# Altium PCB BMS.PcbDoc (part 1 of 2)
Units mil, origin at the board's own origin, x right, y up, seen from the top; angles counter-clockwise.
Board outline 1940 x 2890 mil, 2 copper layers (Top Layer, Bottom Layer); 210 components, 157 nets, 682 pads, 299 vias.
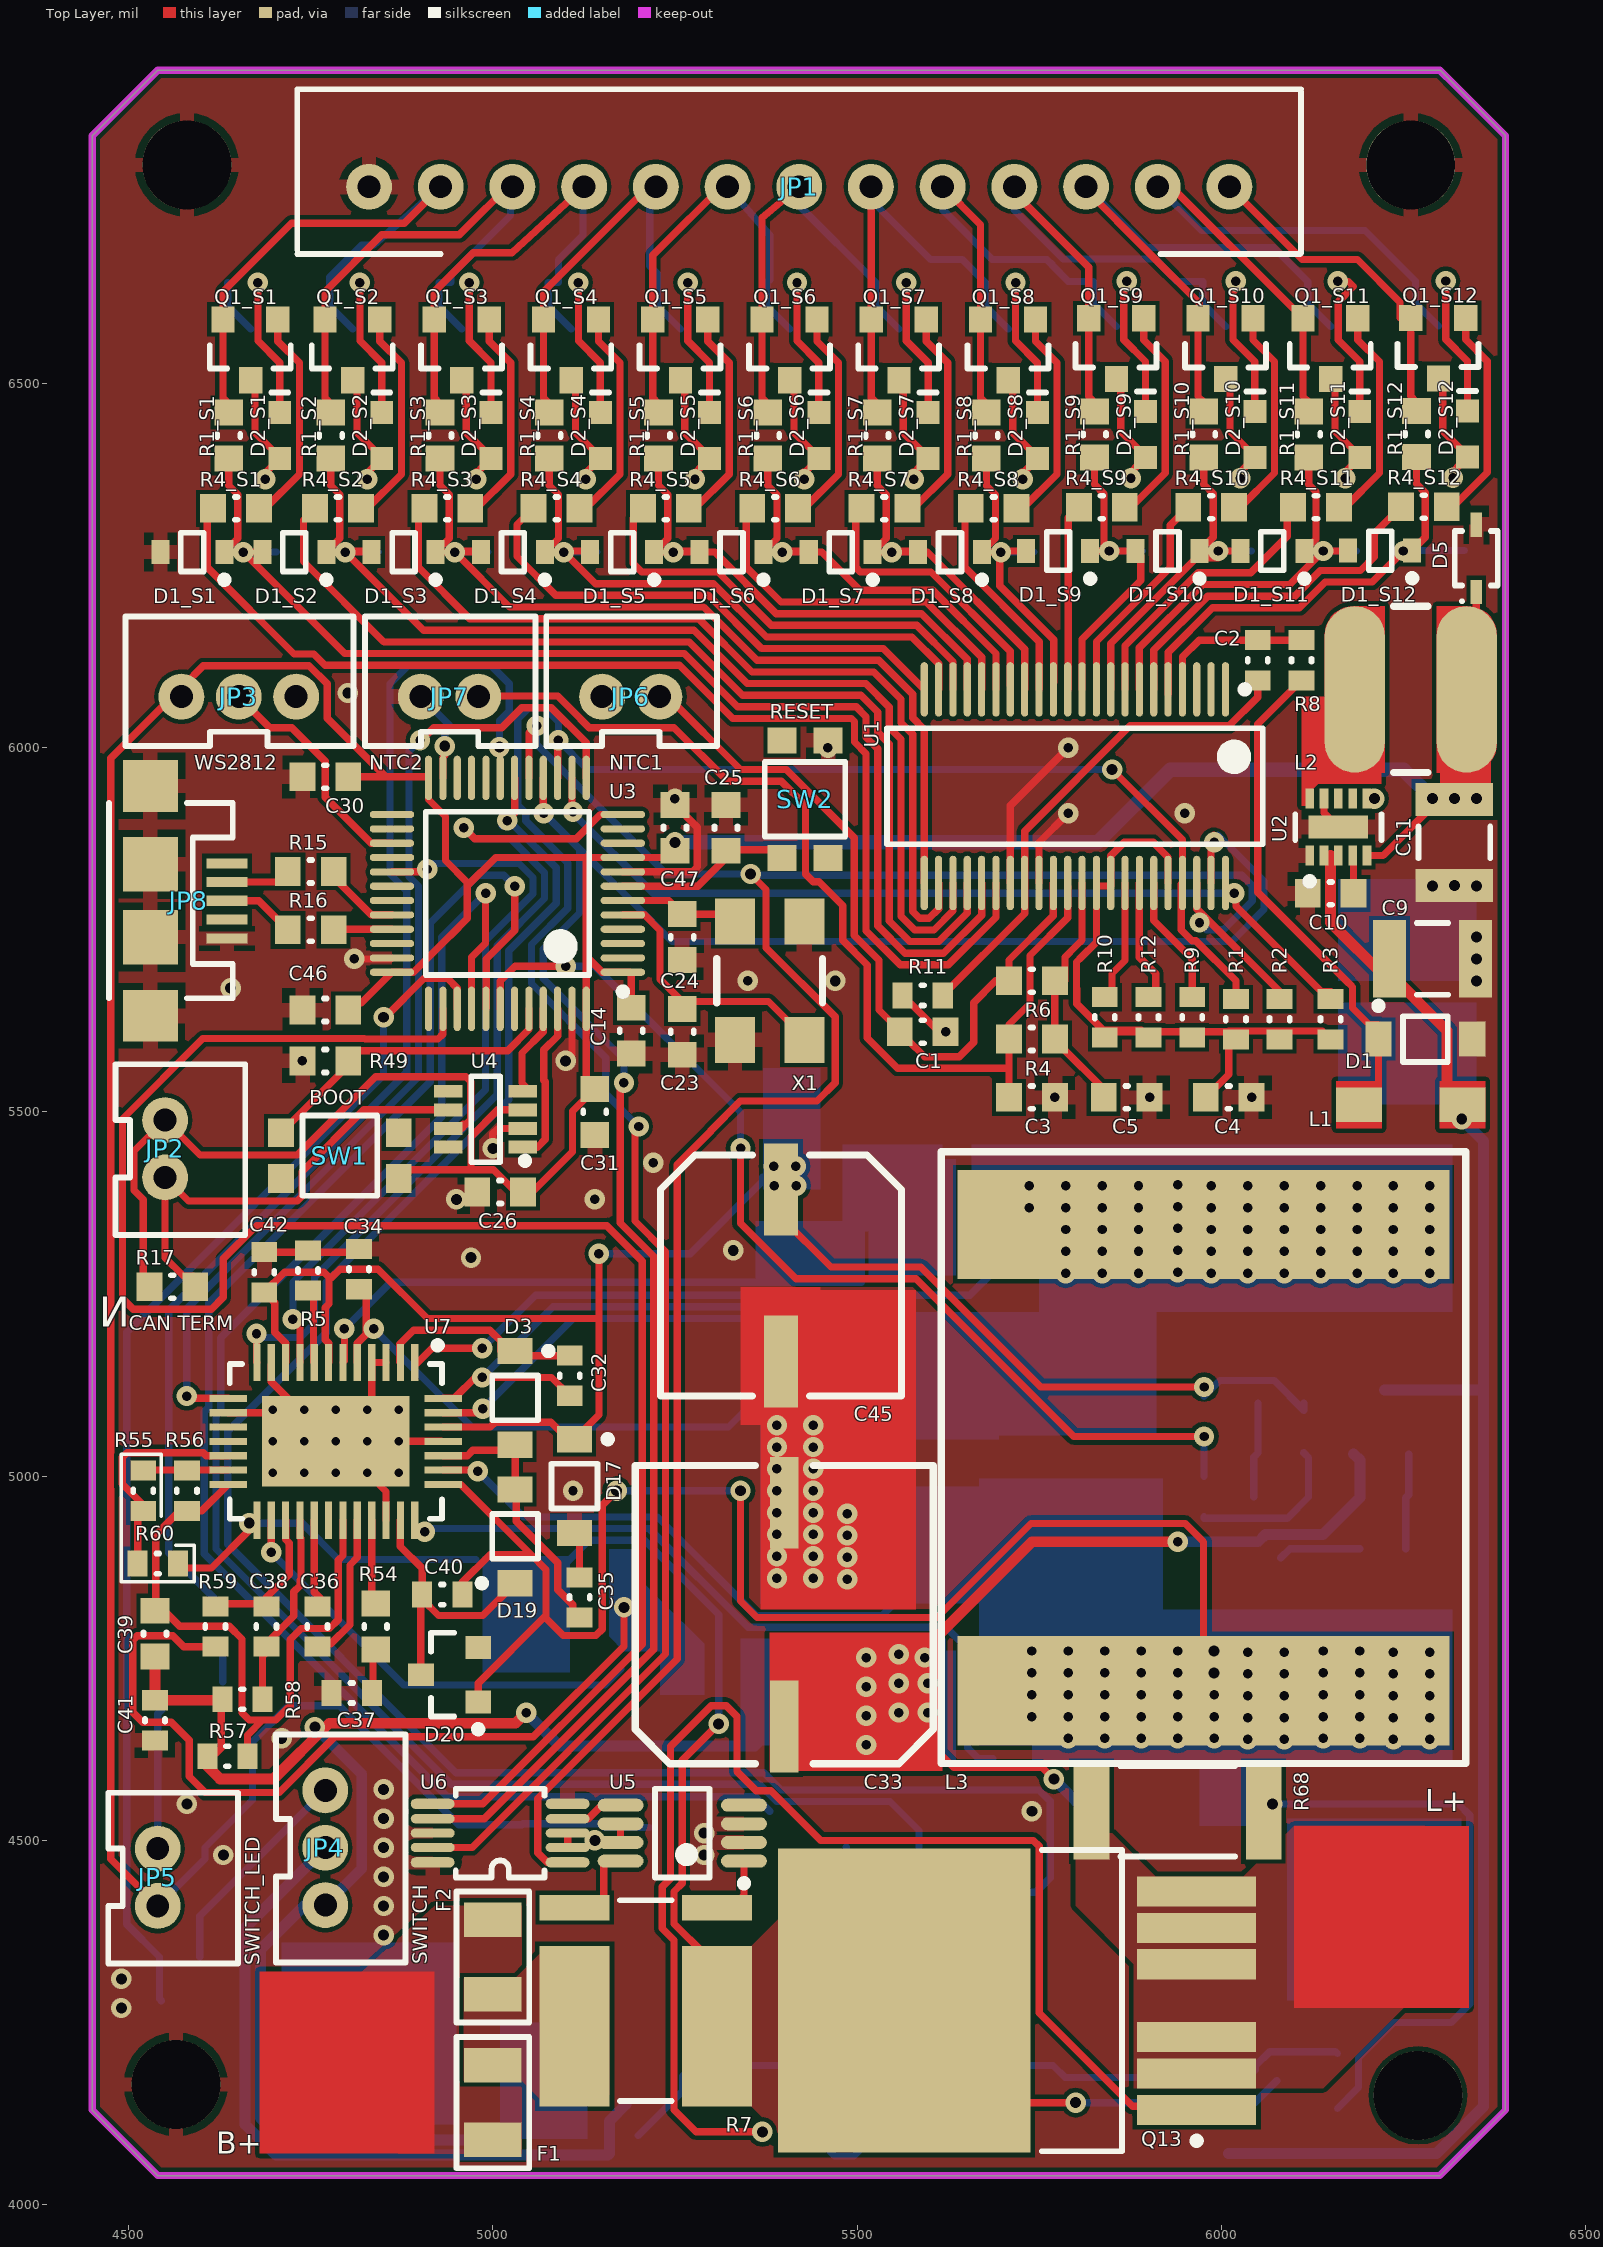
[diagram p0: Top Layer view]
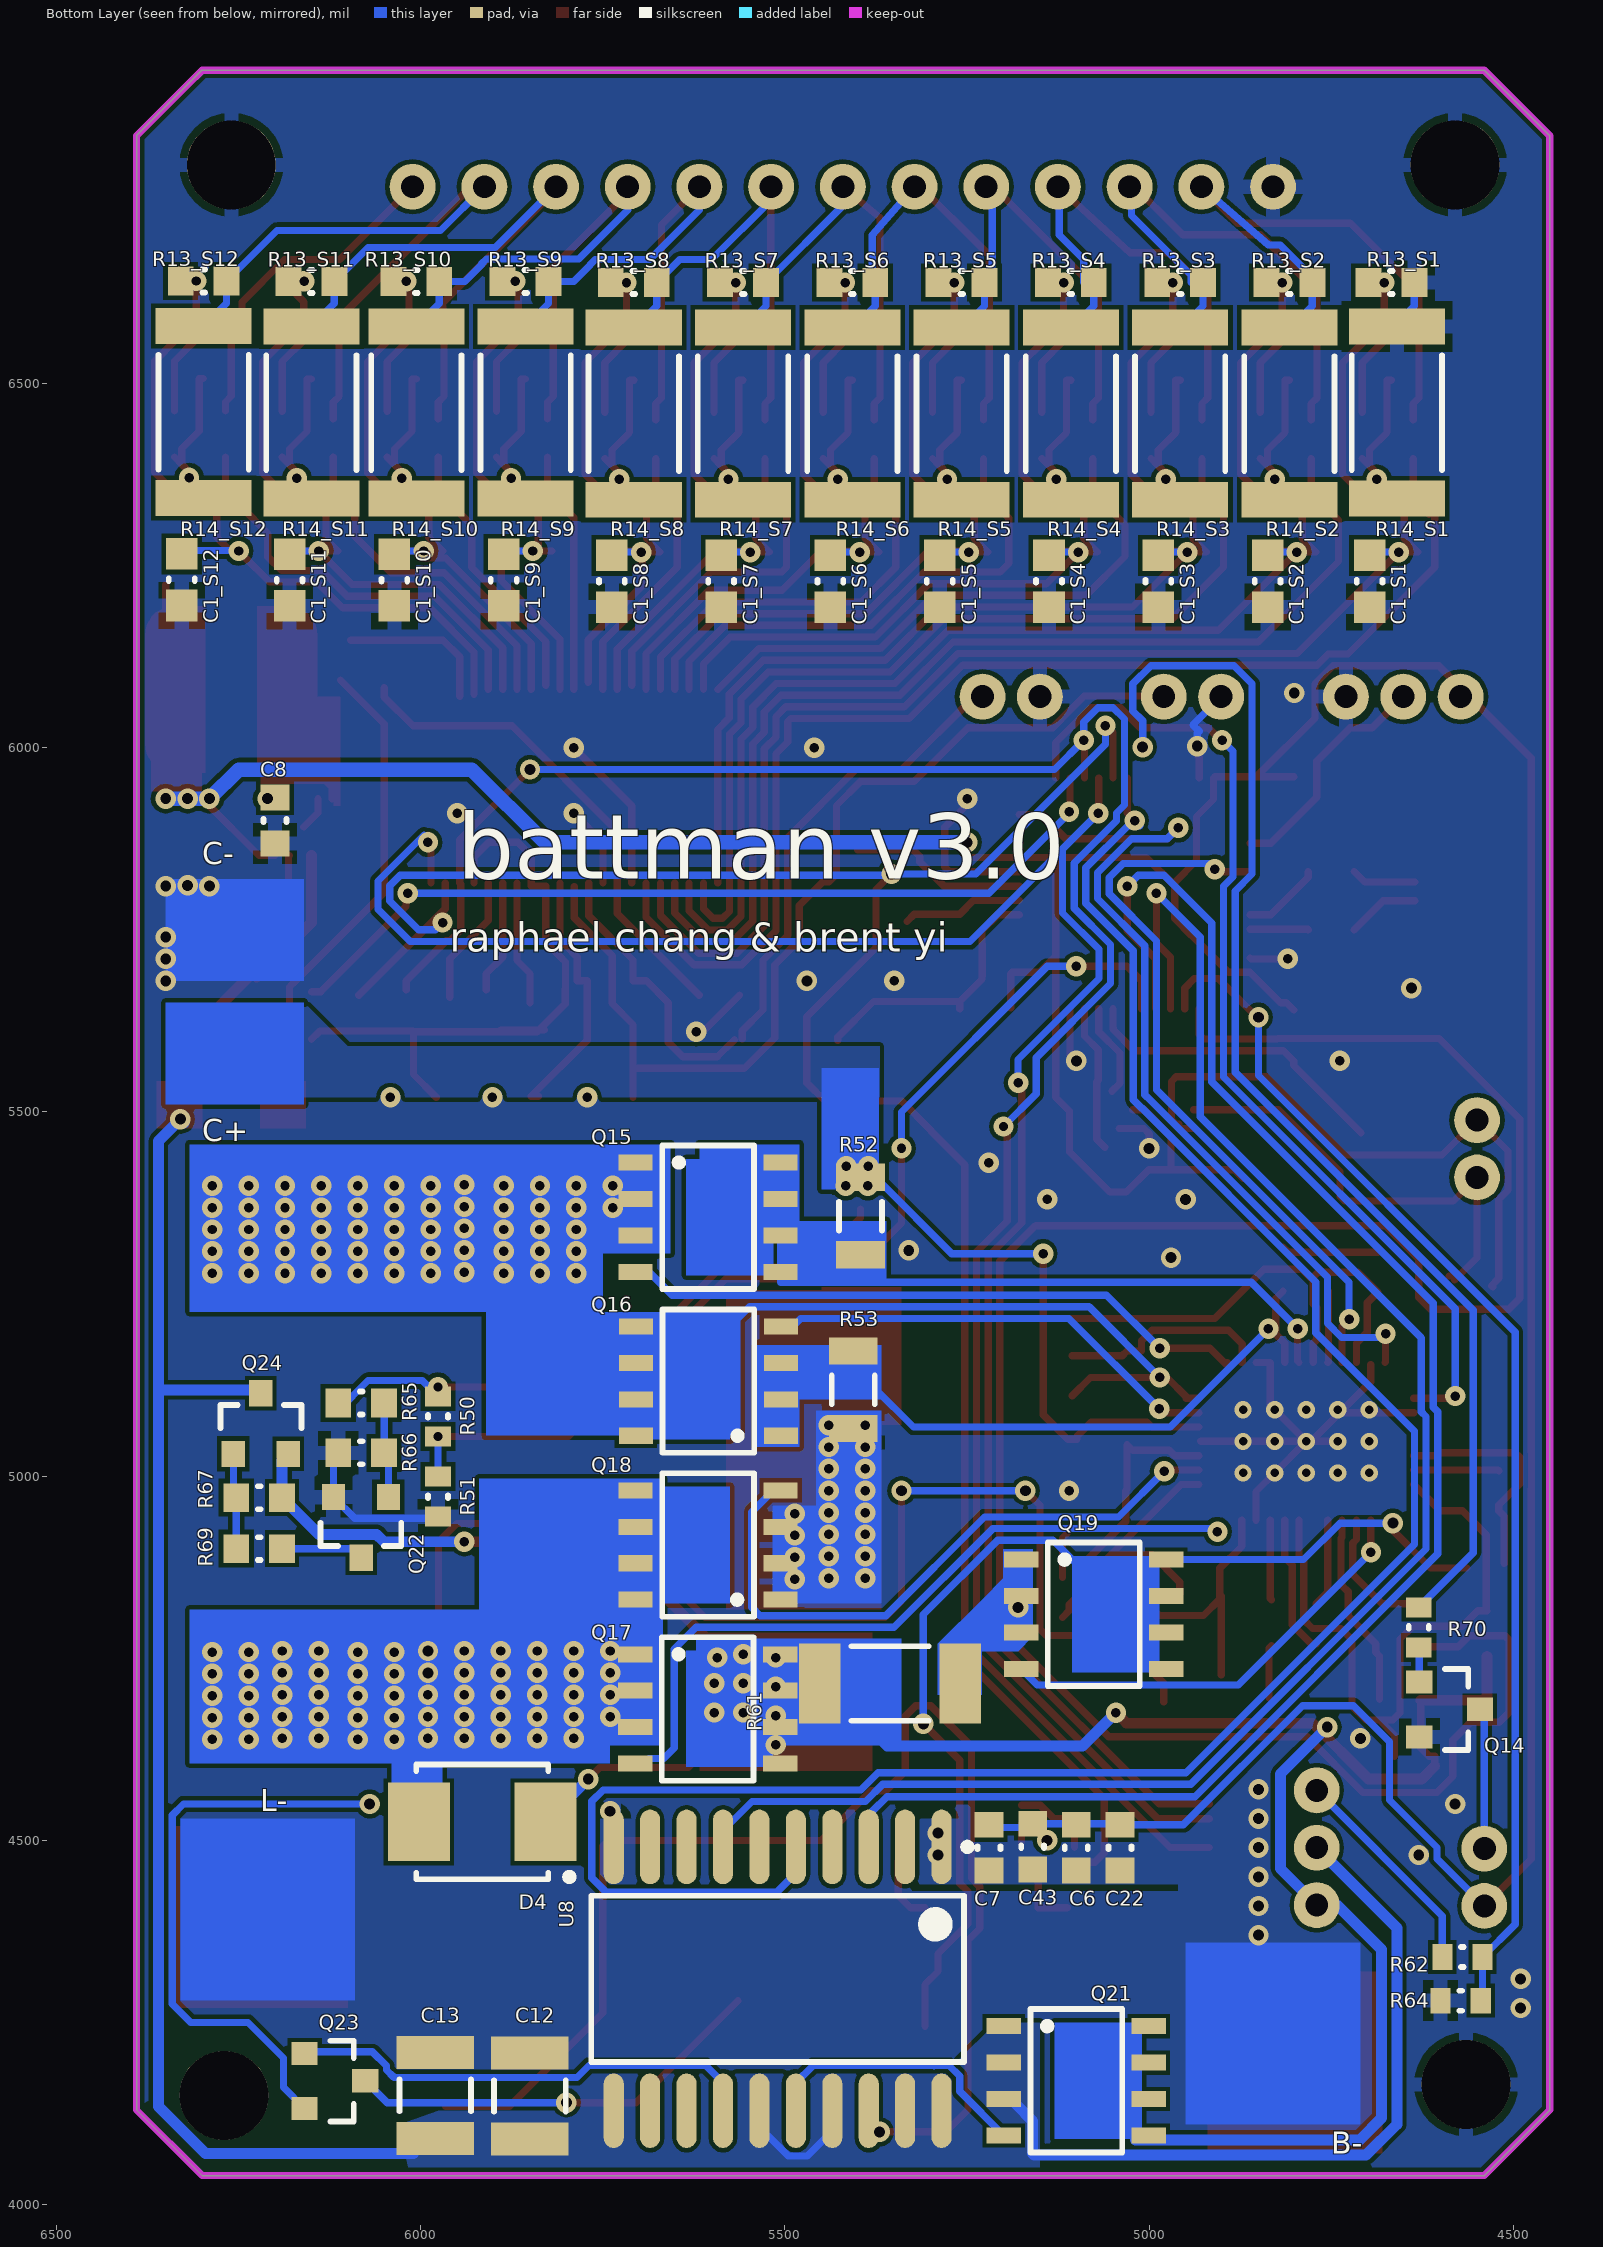
[diagram p1: Bottom Layer view, seen from below]

## Layer stack, top to bottom
Top Solder: solder mask 0.4, Solder Resist, Dk 3.5
Top Layer: signal copper 1.4
Dielectric 1: dielectric 12.6, FR-4, Dk 4.8
Bottom Layer: signal copper 1.4
Bottom Solder: solder mask 0.4, Solder Resist, Dk 3.5

## Board outline
4450,4130 4540,4040 6300,4040 6390,4130 6390,6840 6320,6910 6300,6930 4540,6930 4450,6840

## Design rules (kind name [scope] priority, off if disabled: settings)
Clearance [All] p1: gap=6
HoleSize [All] p1: absolutevalues=TRUE maxlimit=500 minlimit=1 maxpercent=80.000 minpercent=20.000
MinimumSolderMaskSliver [All] p1: minsoldermaskwidth=3
PlaneClearance PlaneClearanceGround [IsNamedPolygon('Power')] p1: clearance=10
PlaneClearance [All] p2: clearance=20
PolygonConnect PolygonConnectPower [IsNamedPolygon('Power')] p1: connectstyle=Direct reliefconductorwidth=10 reliefentries=4 polygonreliefangle="90 Angle" airgapwidth=10
PolygonConnect PolygonConnectVDD [All vs InNet('VDD')] p2: connectstyle=Direct reliefconductorwidth=10 reliefentries=4 polygonreliefangle="90 Angle" airgapwidth=10
PolygonConnect PolygonConnectVia [All vs IsVia] p3: connectstyle=Direct reliefconductorwidth=10 reliefentries=4 polygonreliefangle="90 Angle" airgapwidth=10
PolygonConnect [All] p4: connectstyle=Relief reliefconductorwidth=20 reliefentries=4 polygonreliefangle="90 Angle" airgapwidth=10
RoomDefinition Power [InComponentClass('Power')] p1: confinementstyle=ConfineIn formatcopy=TRUE lockcomponents=FALSE outline 4458.16,4317.26 4458.16,4579.51 4515,4579.51 4515,4749.12 4597.36,4749.12 4597.36,4848.7 4662.64,4848.7 4662.64,4659.51 4894,4659.51 4894,4627.76 6104.53,4627.76 6104.53,4239.12 6190.37,4239.12 6190.37,4099.96 6067.6,4099.96 6067.6,4040.51 5063.94,4040.51 5063.94,4036.06 4936.06,4036.06 4936.06,4247.36 4516.18,4247.36 4516.18,4307.36 4513.74,4307.36 4513.74,4317.26
RoomDefinition BuckConverter [InComponentClass('BuckConverter')] p2: confinementstyle=ConfineIn formatcopy=TRUE lockcomponents=FALSE outline 6079.96,5759.49 6079.96,5840.51 6086.65,5840.51 6086.65,5958.7 6128.89,5958.7 6128.89,6219.17 6303.58,6219.17 6303.58,6348.9 6396.42,6348.9 6396.42,6191.1 6393.98,6191.1 6393.98,5766.5 6393.5,5766.5 6393.5,5636.02 6186.5,5636.02 6186.5,5759.49
RoomDefinition U_Charging [InComponentClass('U_Charging')] p3: confinementstyle=ConfineIn formatcopy=TRUE lockcomponents=FALSE outline 4480,4841.24 4480,4906.52 4492.94,4906.52 4492.94,5181.75 4598.2,5181.75 4598.2,5199.49 4653.62,5199.49 4653.62,5336.2 4713.62,5336.2 4713.62,5338.65 4783.62,5338.65 4783.62,5340.43 5215.22,5340.43 5215.22,5482.34 5575.93,5482.34 5575.93,5467.85 5741.59,5467.85 5741.59,5460.49 6350.57,5460.49 6350.57,4590.49 6060,4590.49 6060,4430 5771.15,4430 5771.15,4568.13 5470.06,4568.13 5470.06,4575.51 5176.54,4575.51 5176.54,4582.85 4579.32,4582.85 4579.32,4608.57 4503.62,4608.57 4503.62,4713.84 4495.75,4713.84 4495.75,4841.24
RoomDefinition U_MCU [InComponentClass('U_MCU')] p4: confinementstyle=ConfineIn formatcopy=TRUE lockcomponents=FALSE outline 4407.24,5583.5 4407.24,5995.98 4481.75,5995.98 4481.75,6194 4822.74,6194 4822.74,6040.72 5497.56,6040.72 5497.56,5817.87 5468,5817.87 5468,5554 5300.51,5554 5300.51,5539.96 5180.51,5539.96 5180.51,5429.96 5083.66,5429.96 5083.66,5410.12 5080.04,5410.12 5080.04,5349.49 4674,5349.49 4674,5317.26 4630.04,5317.26 4630.04,5219.49 4489.96,5219.49 4489.96,5317.26 4468.16,5317.26 4468.16,5583.5
RoomDefinition U_LTC6803 [InComponentClass('U_LTC6803')] p5: confinementstyle=ConfineIn formatcopy=TRUE lockcomponents=FALSE outline 4717.57,6663.48 4717.57,6917.86 6123.53,6917.86 6123.53,6176.26 6142.64,6176.26 6142.64,5683.48 6182.64,5683.48 6182.64,5665.51 6377.2,5665.51 6377.2,5557.4 6377.28,5557.4 6377.28,5462.6 6142.72,5462.6 6142.72,5479.49 5669.96,5479.49 5669.96,5569.49 5519.96,5569.49 5519.96,5988.16 4810.49,5988.16 4810.49,6663.48
RoomDefinition S12 [InComponentClass('S12')] p6: confinementstyle=ConfineIn formatcopy=TRUE lockcomponents=FALSE outline 6152,6150.63 6388,6150.63 6388,6690.63 6152,6690.63
RoomDefinition S11 [InComponentClass('S11')] p7: confinementstyle=ConfineIn formatcopy=TRUE lockcomponents=TRUE outline 6004,6150 6240,6150 6240,6690 6004,6690
RoomDefinition S10 [InComponentClass('S10')] p8: confinementstyle=ConfineIn formatcopy=TRUE lockcomponents=FALSE outline 5860,6150 6096,6150 6096,6690 5860,6690
RoomDefinition S9 [InComponentClass('S9')] p9: confinementstyle=ConfineIn formatcopy=TRUE lockcomponents=FALSE outline 5710,6150 5946,6150 5946,6690 5710,6690
RoomDefinition S8 [InComponentClass('S8')] p10: confinementstyle=ConfineIn formatcopy=TRUE lockcomponents=FALSE outline 5560,6150 5796,6150 5796,6690 5560,6690
RoomDefinition S7 [InComponentClass('S7')] p11: confinementstyle=ConfineIn formatcopy=TRUE lockcomponents=FALSE outline 5410,6150 5646,6150 5646,6690 5410,6690
RoomDefinition S6 [InComponentClass('S6')] p12: confinementstyle=ConfineIn formatcopy=TRUE lockcomponents=FALSE outline 5260,6150 5496,6150 5496,6690 5260,6690
RoomDefinition S5 [InComponentClass('S5')] p13: confinementstyle=ConfineIn formatcopy=TRUE lockcomponents=FALSE outline 5110,6150 5346,6150 5346,6690 5110,6690
RoomDefinition S4 [InComponentClass('S4')] p14: confinementstyle=ConfineIn formatcopy=TRUE lockcomponents=FALSE outline 4960,6150 5196,6150 5196,6690 4960,6690
RoomDefinition S3 [InComponentClass('S3')] p15: confinementstyle=ConfineIn formatcopy=TRUE lockcomponents=FALSE outline 4810,6150 5046,6150 5046,6690 4810,6690
RoomDefinition S2 [InComponentClass('S2')] p16: confinementstyle=ConfineIn formatcopy=TRUE lockcomponents=FALSE outline 4660,6150 4896,6150 4896,6690 4660,6690
RoomDefinition S1 [InComponentClass('S1')] p17: confinementstyle=ConfineIn formatcopy=TRUE lockcomponents=FALSE outline 4520,6150 4756,6150 4756,6690 4520,6690
RoutingVias [All] p1: holewidth=28 width=50 viastyle="Through Hole" minholewidth=20 minwidth=40 maxholewidth=28 maxwidth=50
SilkToSilkClearance [All] p1: silktosilkclearance=0
SolderMaskExpansion SolderMaskExpansionVia [IsVia] p1: expansion=4 soldermaskfromhole=TRUE
SolderMaskExpansion [All] p2: expansion=3
Width [All] p1: maxlimit=500 minlimit=10 preferedwidth=10 minimp=50.000000 maximp=50.000000 favimp=50.000000
26 further rules are at their usual default settings.

## Classes and differential pairs
component class BuckConverter: C8 C9 C10 C11 D5 L2 U2
channel class Cell: S1 S2 S3 S4 S5 S6 S7 S8 S9 S10 S11 S12
component class U_MCU: C14 C23 C24 C25 C26 C30 C31 C46 C47 JP2 JP3 JP8 R15 R16 R17 R49 SW1 SW2 U3 U4 X1
component class S12: C1_S12 D1_S12 D2_S12 Q1_S12 R1_S12 R4_S12 R13_S12 R14_S12
component class S11: C1_S11 D1_S11 D2_S11 Q1_S11 R1_S11 R4_S11 R13_S11 R14_S11
component class S10: C1_S10 D1_S10 D2_S10 Q1_S10 R1_S10 R4_S10 R13_S10 R14_S10
component class S9: C1_S9 D1_S9 D2_S9 Q1_S9 R1_S9 R4_S9 R13_S9 R14_S9
component class S8: C1_S8 D1_S8 D2_S8 Q1_S8 R1_S8 R4_S8 R13_S8 R14_S8
component class S7: C1_S7 D1_S7 D2_S7 Q1_S7 R1_S7 R4_S7 R13_S7 R14_S7
component class S6: C1_S6 D1_S6 D2_S6 Q1_S6 R1_S6 R4_S6 R13_S6 R14_S6
component class S5: C1_S5 D1_S5 D2_S5 Q1_S5 R1_S5 R4_S5 R13_S5 R14_S5
component class S4: C1_S4 D1_S4 D2_S4 Q1_S4 R1_S4 R4_S4 R13_S4 R14_S4
component class S3: C1_S3 D1_S3 D2_S3 Q1_S3 R1_S3 R4_S3 R13_S3 R14_S3
component class S2: C1_S2 D1_S2 D2_S2 Q1_S2 R1_S2 R4_S2 R13_S2 R14_S2
component class S1: C1_S1 D1_S1 D2_S1 Q1_S1 R1_S1 R4_S1 R13_S1 R14_S1
component class U_Charging: C32 C33 C34 C35 C36 C37 C38 C39 C40 C41 C42 C45 D3 D4 D17 D19 D20 L3 Q15 Q16 Q17 Q18 Q19 Q22 Q24 R5 R50 R51 R52 R53 R54 R55 R56 R57 R58 R59 R60 R61 R65 R66 R67 R69 U7
component class U_LTC6803: C1 C2 C3 C4 C5 D1 JP1 JP6 JP7 L1 R1 R2 R3 R4 R6 R8 R9 R10 R11 R12 U1
component class Power: C6 C7 C12 C13 C22 C43 C? F1 F2 JP4 JP5 Q13 Q14 Q21 Q23 R7 R62 R64 R68 R70 U5 U6 U8

## Components (designator, comment, footprint, x,y, rotation, side; value= is the part's Value field where it differs from the comment)
C1 "1uF" CAPC0603(1608)100_N 5590,5610 r180 top
C1_S1 "100nF" CAPC0603(1608)100_M 4697.5,6228.5 r270 bottom (schematic designator C1)
C1_S2 "100nF" CAPC0603(1608)100_M 4837.5,6228.5 r270 bottom (schematic designator C1)
C1_S3 "100nF" CAPC0603(1608)100_M 4987.5,6228.5 r270 bottom (schematic designator C1)
C1_S4 "100nF" CAPC0603(1608)100_M 5137.5,6228.5 r270 bottom (schematic designator C1)
C1_S5 "100nF" CAPC0603(1608)100_M 5287.5,6228.5 r270 bottom (schematic designator C1)
C1_S6 "100nF" CAPC0603(1608)100_M 5437.5,6228.5 r270 bottom (schematic designator C1)
C1_S7 "100nF" CAPC0603(1608)100_M 5587.5,6228.5 r270 bottom (schematic designator C1)
C1_S8 "100nF" CAPC0603(1608)100_M 5737.5,6228.5 r270 bottom (schematic designator C1)
C1_S9 "100nF" CAPC0603(1608)100_M 5886,6230 r270 bottom (schematic designator C1)
C1_S10 "100nF" CAPC0603(1608)100_M 6036,6230 r270 bottom (schematic designator C1)
C1_S11 "100nF" CAPC0603(1608)100_M 6180,6230 r270 bottom (schematic designator C1)
C1_S12 "100nF" CAPC0603(1608)100_M 6328,6230.63 r270 bottom (schematic designator C1)
C2 "100nF" CAPC0603(1608)100_L 6050,6120 r90 top
C3 "1uF" CAPC0603(1608)100_N 5740,5520 r180 top
C4 "1uF" CAPC0603(1608)100_N 6010,5520 r180 top
C5 "1uF" CAPC0603(1608)100_N 5870,5520 r180 top
C6 "0.1uF" CAPC0603(1608)55_N 5100,4490 r270 bottom
C7 "" CAPC0603(1608)100_N 5220,4490 r270 bottom
C8 "" CAPC0603(1608)55_N 6200,5900 r270 bottom
C9 "" CAPC1210(3225)280_N 6290,5710 r180 top
C10 "" CAPC0603(1608)100_N 6150,5800 r180 top
C11 "" CAPC1210(3225)280_N 6320,5870 r90 top
C12 "" CAPC1210(3225)280_N 5850,4149.06 r270 bottom
C13 "" CAPC1210(3225)280_N 5980,4150 r270 bottom
C14 "4.7uF" CAPC0603(1608)55_N 5190,5611.5 r90 top
C22 "2.2uF" CAPC0603(1608)55_N 5040,4490 r90 bottom
C23 "" CAPC0603(1608)55_N 5260,5610 r270 top
C24 "" CAPC0603(1608)55_N 5260,5740 r270 top
C25 "" CAPC0603(1608)55_N 5320,5890 r270 top
C26 "2.2uF" CAPC0603(1608)55_N 5010,5390 r0 top
C30 "2.2uF" CAPC0603(1608)55_N 4770,5960 r0 top
C31 "" CAPC0603(1608)55_N 5140,5500 r90 top
C32 "1uF" CAPC0603(1608)100_L 5105.57,5137.93 r270 top
C33 "" "CAP 180UF 50V" 5400,4810 r180 top
C34 "33nF" CAPC0603(1608)100_L 4816.26,5284.17 r90 top
C35 "4.7uF" CAPC0603(1608)55_L 5119.08,4833.58 r270 top
C36 "2nF" CAPC0603(1608)100_L 4759.08,4793.58 r270 top
C37 "680pF" CAPC0603(1608)100_L 4806.26,4702.39 r180 top
C38 "0.33uF" CAPC0603(1608)100_L 4689.08,4793.58 r270 top
C39 "1.5nF" CAPC0603(1608)100_N 4536.26,4783.88 r270 top
C40 "1uF" CAPC0603(1608)100_L 4930.57,4837.44 r0 top
C41 "0.1uF" CAPC0603(1608)100_L 4536.26,4664.83 r90 top
C42 "1uF" CAPC0603(1608)100_L 4686.26,5279.94 r270 top
C43 "2.2uF" CAPC0603(1608)55_N 5160,4491.5 r90 bottom
C45 "150uF" "CAP 150UF 25V" 5395.57,5275.49 r0 top
C46 "2.2uF" CAPC0603(1608)55_N 4770,5640 r0 top
C47 "2.2uF" CAPC0603(1608)55_N 5250,5890 r270 top
D1 "" SOD-123 6280,5600 r0 top
D1_S1 "MM3Z12VT1G" ONSC-SOD-323-2-477-02_V 4587.49,6268.5 r180 top (schematic designator D1)
D1_S2 "MM3Z12VT1G" ONSC-SOD-323-2-477-02_V 4727.5,6268.5 r180 top (schematic designator D1)
D1_S3 "MM3Z12VT1G" ONSC-SOD-323-2-477-02_V 4877.5,6268.5 r180 top (schematic designator D1)
D1_S4 "MM3Z12VT1G" ONSC-SOD-323-2-477-02_V 5027.5,6268.5 r180 top (schematic designator D1)
D1_S5 "MM3Z12VT1G" ONSC-SOD-323-2-477-02_V 5177.5,6268.5 r180 top (schematic designator D1)
D1_S6 "MM3Z12VT1G" ONSC-SOD-323-2-477-02_V 5327.5,6268.5 r180 top (schematic designator D1)
D1_S7 "MM3Z12VT1G" ONSC-SOD-323-2-477-02_V 5477.5,6268.5 r180 top (schematic designator D1)
D1_S8 "MM3Z12VT1G" ONSC-SOD-323-2-477-02_V 5627.5,6268.5 r180 top (schematic designator D1)
D1_S9 "MM3Z12VT1G" ONSC-SOD-323-2-477-02_V 5776,6270 r180 top (schematic designator D1)
D1_S10 "MM3Z12VT1G" ONSC-SOD-323-2-477-02_V 5926,6270 r180 top (schematic designator D1)
D1_S11 "MM3Z12VT1G" ONSC-SOD-323-2-477-02_V 6070,6270 r180 top (schematic designator D1)
D1_S12 "MM3Z12VT1G" ONSC-SOD-323-2-477-02_V 6218,6270.63 r180 top (schematic designator D1)
D2_S1 "RED" 0603_A 4707.5,6428.5 r270 top (schematic designator D2)
D2_S2 "RED" 0603_A 4847.5,6428.5 r270 top (schematic designator D2)
D2_S3 "RED" 0603_A 4997.5,6428.5 r270 top (schematic designator D2)
D2_S4 "RED" 0603_A 5147.5,6428.5 r270 top (schematic designator D2)
D2_S5 "RED" 0603_A 5297.5,6428.5 r270 top (schematic designator D2)
D2_S6 "RED" 0603_A 5447.5,6428.5 r270 top (schematic designator D2)
D2_S7 "RED" 0603_A 5597.5,6428.5 r270 top (schematic designator D2)
D2_S8 "RED" 0603_A 5747.5,6428.5 r270 top (schematic designator D2)
D2_S9 "RED" 0603_A 5896,6430 r270 top (schematic designator D2)
D2_S10 "RED" 0603_A 6046,6430 r270 top (schematic designator D2)
D2_S11 "RED" 0603_A 6190,6430 r270 top (schematic designator D2)
D2_S12 "RED" 0603_A 6338,6430.63 r270 top (schematic designator D2)
D3 "SBR0560S1" SOD-123 5030.57,5107.44 r270 top
D4 "MBRS360" ONSC-SMB-2-403A-03_H_V 5915.57,4525.49 r0 bottom
D5 "SP4020-01FTG" SOD323 6350,6260 r90 top
D17 "MMSZ24T1G" ONSC-SOD-123-2-425-04_V 5112.07,4986.38 r270 top
D19 "SBR0560S1" SOD-123 5030.57,4917.44 r90 top
D20 "BZX84C6V2L" ONSC-SOT-23-3-318-08_V 4940.57,4727.44 r180 top
F1 "25A" 1206_FUSE 5000,4140 r90 top
F2 "25A" 1206_FUSE 5000,4340 r270 top
JP1 "" JST-13-PTH-VERT 4830,6770 r0 top
JP2 "" JST-2-PTH-VERT 4550,5449.37 r270 top
JP3 "WS2812" JST-3-PTH-VERT 4651.26,6070 r0 top
JP4 "SWITCH" JST-3-PTH-VERT 4770,4490 r270 top
JP5 "SWITCH_LED" JST-2-PTH-VERT 4540,4449.37 r270 top
JP6 "NTC1" JST-2-PTH-VERT 5189.37,6070 r0 top
JP7 "NTC2" JST-2-PTH-VERT 4940.63,6070 r0 top
JP8 "USB" USB-MICROB 4530,5790 r270 top
L1 "" MURA-BLM31-B60-CHIP-2_V3 6260,5510 r180 top
L2 "SDR0805-180ML" SDR0604 6260,6080 r0 top
L3 "22uH" IHLP-6767GZ 5975.57,5025.49 r270 top
Q1_S1 "SI2365" SOT23-3 4667.49,6548.5 r180 top (schematic designator Q1)
Q1_S2 "SI2365" SOT23-3 4807.5,6548.5 r180 top (schematic designator Q1)
Q1_S3 "SI2365" SOT23-3 4957.5,6548.5 r180 top (schematic designator Q1)
Q1_S4 "SI2365" SOT23-3 5107.5,6548.5 r180 top (schematic designator Q1)
Q1_S5 "SI2365" SOT23-3 5257.5,6548.5 r180 top (schematic designator Q1)
Q1_S6 "SI2365" SOT23-3 5407.5,6548.5 r180 top (schematic designator Q1)
Q1_S7 "SI2365" SOT23-3 5557.5,6548.5 r180 top (schematic designator Q1)
Q1_S8 "SI2365" SOT23-3 5707.5,6548.5 r180 top (schematic designator Q1)
Q1_S9 "SI2365" SOT23-3 5856,6550 r180 top (schematic designator Q1)
Q1_S10 "SI2365" SOT23-3 6006,6550 r180 top (schematic designator Q1)
Q1_S11 "SI2365" SOT23-3 6150,6550 r180 top (schematic designator Q1)
Q1_S12 "SI2365" SOT23-3 6298,6550.63 r180 top (schematic designator Q1)
Q13 "IRFS7530" DPAK127P1525X483-7N 5720,4280 r180 top
Q14 "BSS138" SOT23-3 4590,4680 r270 bottom
Q15 "FDS5672" SOIC127P600X175-8N 5605.57,5355.49 r180 bottom
Q16 "FDS5672" SOIC127P600X175-8N 5605.08,5130.49 r0 bottom
Q17 "FDS5672" SOIC127P600X175-8N 5606.07,4680.49 r180 bottom
Q18 "FDS5672" SOIC127P600X175-8N 5605.57,4905.49 r0 bottom
Q19 "SQJ461EP-T1" SOIC127P600X175-8N 5076.07,4810.49 r180 bottom
Q21 "FDS5672" SOIC127P600X175-8N 5100,4170 r180 bottom
Q22 "BSS138" SOT23-3 6081.69,4932.02 r0 bottom
Q23 "BSS138" SOT23-3 6120,4170 r270 bottom
Q24 "BSS84P" SOT23-3 6219.69,5069.89 r180 bottom
R1 "1M" RESC0603(1608)_L 6020,5627.22 r90 top
R1_S1 "100R" RESC0603(1608)_N 4637.5,6428.5 r90 top (schematic designator R1)
R1_S2 "100R" RESC0603(1608)_N 4777.5,6428.5 r90 top (schematic designator R1)
R1_S3 "100R" RESC0603(1608)_N 4927.5,6428.5 r90 top (schematic designator R1)
R1_S4 "100R" RESC0603(1608)_N 5077.5,6428.5 r90 top (schematic designator R1)
R1_S5 "100R" RESC0603(1608)_N 5227.5,6428.5 r90 top (schematic designator R1)
R1_S6 "100R" RESC0603(1608)_N 5377.5,6428.5 r90 top (schematic designator R1)
R1_S7 "100R" RESC0603(1608)_N 5527.5,6428.5 r90 top (schematic designator R1)
R1_S8 "100R" RESC0603(1608)_N 5677.5,6428.5 r90 top (schematic designator R1)
R1_S9 "100R" RESC0603(1608)_N 5826,6430 r90 top (schematic designator R1)
R1_S10 "100R" RESC0603(1608)_N 5976,6430 r90 top (schematic designator R1)
R1_S11 "100R" RESC0603(1608)_N 6120,6430 r90 top (schematic designator R1)
R1_S12 "100R" RESC0603(1608)_N 6268,6430.63 r90 top (schematic designator R1)
R2 "1M" RESC0603(1608)_L 6080,5627.22 r90 top
R3 "1M" RESC0603(1608)_L 6150,5627.22 r90 top
R4 "100K" RESC0603(1608)_N 5740,5600 r0 top
R4_S1 "3K3" RESC0603(1608)_N 4647.5,6328.5 r0 top (schematic designator R4)
R4_S2 "3K3" RESC0603(1608)_N 4787.5,6328.5 r0 top (schematic designator R4)
R4_S3 "3K3" RESC0603(1608)_N 4937.5,6328.5 r0 top (schematic designator R4)
R4_S4 "3K3" RESC0603(1608)_N 5087.5,6328.5 r0 top (schematic designator R4)
R4_S5 "3K3" RESC0603(1608)_N 5237.5,6328.5 r0 top (schematic designator R4)
R4_S6 "3K3" RESC0603(1608)_N 5387.5,6328.5 r0 top (schematic designator R4)
R4_S7 "3K3" RESC0603(1608)_N 5537.5,6328.5 r0 top (schematic designator R4)
R4_S8 "3K3" RESC0603(1608)_N 5687.5,6328.5 r0 top (schematic designator R4)
R4_S9 "3K3" RESC0603(1608)_N 5836,6330 r0 top (schematic designator R4)
R4_S10 "3K3" RESC0603(1608)_N 5986,6330 r0 top (schematic designator R4)
R4_S11 "3K3" RESC0603(1608)_N 6130,6330 r0 top (schematic designator R4)
R4_S12 "3K3" RESC0603(1608)_N 6278,6330.63 r0 top (schematic designator R4)
R5 "120K" RESC0603(1608)_L 4746.26,5282.39 r90 top
R6 "100K" RESC0603(1608)_N 5740,5680 r0 top
R7 "WSLP2726" WSL2726 5210,4280 r0 top
R8 "100R" RESC0603(1608)_L 6110,6120 r270 top
R9 "1M" RESC0603(1608)_L 5960,5630 r90 top
R10 "1M" RESC0603(1608)_L 5840,5630 r90 top
R11 "100R" RESC0603(1608)_L 5590,5660 r0 top
R12 "1M" RESC0603(1608)_L 5900,5630 r90 top
R13_S1 "" RESC2512(6432)_N 4660,6460 r90 bottom (schematic designator R13)
R13_S2 "" RESC2512(6432)_N 4807.5,6458.5 r90 bottom (schematic designator R13)
R13_S3 "" RESC2512(6432)_N 4957.5,6458.5 r90 bottom (schematic designator R13)
R13_S4 "" RESC2512(6432)_N 5107.5,6458.5 r90 bottom (schematic designator R13)
R13_S5 "" RESC2512(6432)_N 5257.5,6458.5 r90 bottom (schematic designator R13)
R13_S6 "" RESC2512(6432)_N 5407.5,6458.5 r90 bottom (schematic designator R13)
R13_S7 "" RESC2512(6432)_N 5557.5,6458.5 r90 bottom (schematic designator R13)
R13_S8 "" RESC2512(6432)_N 5707.5,6458.5 r90 bottom (schematic designator R13)
R13_S9 "" RESC2512(6432)_N 5856,6460 r90 bottom (schematic designator R13)
R13_S10 "" RESC2512(6432)_N 6006,6460 r90 bottom (schematic designator R13)
R13_S11 "" RESC2512(6432)_N 6150,6460 r90 bottom (schematic designator R13)
R13_S12 "" RESC2512(6432)_N 6298,6460.63 r90 bottom (schematic designator R13)
R14_S1 "100R" RESC0603(1608)_N 4667.49,6638.5 r0 bottom (schematic designator R14)
R14_S2 "100R" RESC0603(1608)_N 4807.5,6638.5 r0 bottom (schematic designator R14)
R14_S3 "100R" RESC0603(1608)_N 4957.5,6638.5 r0 bottom (schematic designator R14)
R14_S4 "100R" RESC0603(1608)_N 5107.5,6638.5 r0 bottom (schematic designator R14)
R14_S5 "100R" RESC0603(1608)_N 5257.5,6638.5 r0 bottom (schematic designator R14)
R14_S6 "100R" RESC0603(1608)_N 5407.5,6638.5 r0 bottom (schematic designator R14)
R14_S7 "100R" RESC0603(1608)_N 5557.5,6638.5 r0 bottom (schematic designator R14)
R14_S8 "100R" RESC0603(1608)_N 5707.5,6638.5 r0 bottom (schematic designator R14)
R14_S9 "100R" RESC0603(1608)_N 5856,6640 r0 bottom (schematic designator R14)
R14_S10 "100R" RESC0603(1608)_N 6006,6640 r0 bottom (schematic designator R14)
R14_S11 "100R" RESC0603(1608)_N 6150,6640 r0 bottom (schematic designator R14)
R14_S12 "100R" RESC0603(1608)_N 6298,6640.63 r0 bottom (schematic designator R14)
R15 "" RESC0603(1608)_N 4750,5830 r180 top
R16 "" RESC0603(1608)_N 4750,5750 r180 top
R17 "CAN TERM" RESC0603(1608)_N 4560,5260 r180 top
R49 "" RESC0603(1608)_N 4770,5570 r180 top
R50 "18K" RESC0603(1608)_L 5976.26,5082.02 r90 bottom
R51 "3K6" RESC0603(1608)_L 5976.26,4972.02 r90 bottom
R52 "0.004R" RESC1206(3216)_L 5396.26,5357.03 r90 bottom
R53 "0.004R" RESC1206(3216)_L 5406.26,5118.59 r90 bottom
R54 "33K" RESC0603(1608)_N 4839.08,4793.58 r270 top
R55 "10K7" RESC0603(1608)_L 4520,4980 r270 top
R56 "10K7" RESC0603(1608)_L 4580,4980 r270 top
R57 "174K" RESC0603(1608)_L 4635.57,4615.49 r180 top
R58 "100R" RESC0603(1608)_L 4656.26,4693.88 r180 top
R59 "100R" RESC0603(1608)_L 4619.08,4793.58 r270 top
R60 "174K" RESC0603(1608)_L 4540,4880 r0 top
R61 "0.0082R" RESC2010(5025)_M 5355.57,4715.49 r0 bottom
R62 "464K" RESC0603(1608)_L 4570,4340 r0 bottom
R64 "36K" RESC0603(1608)_L 4572.44,4280 r180 bottom
R65 "10K" RESC0603(1608)_N 6081.69,5100.52 r0 bottom
R66 "3K6" RESC0603(1608)_N 6081.69,5032.02 r180 bottom
R67 "10K" RESC0603(1608)_N 6221.69,4970.52 r180 bottom
R68 "750R" RESC2512(6432)_N 5940,4540 r0 top
R69 "18K" RESC0603(1608)_N 6221.69,4900.52 r0 bottom
R70 "100R" RESC0603(1608)_L 4630,4792.44 r270 bottom
SW1 "BOOT" SWITCH 4790,5440 r0 top
SW2 "RESET" SWITCH 5428.5,5929.29 r90 top
U1 "LTC6803HG-3#PBF" LT-G-44_L 5798.91,5947.13 r270 top
U2 "MAX17502EATB+" MAXM-T1032N+1_V 6160.63,5891.02 r90 top
U3 "STM32F303CBT7" STM-LQFP48_L 5020,5800 r180 top
U4 "TCAN332" SOT65P280X145-6N 4990,5490 r180 top
U5 "AD8418" MSOP-8 5260,4510 r180 top
U6 "LTC2480" MSOP10 5010,4510 r180 top
U7 "LTC4020EUHF" QFN38 4784.43,5047.76 r270 top
U8 "LT1161" LT-SW-20_M 5510,4310 r270 bottom
X1 "8Mhz, 10pF" ABRA-ABM3B-4_V 5380,5680 r90 top

## Footprints (in the part's own frame and the unit in brackets; to place one, negate y for a bottom-side part, rotate by r counter-clockwise, add the part's x,y. Pads: shape width x height; smd on the part's side, far side on the other; paste and mask are expansions set on the pad)
0603_A [mm] "Chip LED, 2-Leads, Body 1.6x0.8mm, IPC Medium Density"
  rect 0.8x0.8 smd: 1(-0.8,0) 2(0.8,0)
  silkscreen extent -1.5,-0.3 -1.5,0.3, body extent -0.8,-0.4 0.8,0.4, height 0.7
1206_FUSE [mm]
  rect 1.2x2 smd: 1(-1.3,0) 2(1.3,0)
  silkscreen extent -2.29,-1.27 2.29,1.27, body extent -1.55,-0.9 1.58,0.93, height 0.75
ABRA-ABM3B-4_V [mil] "SMT Crystal, 4-Leads, Body 5.2x3.4mm"
  rect 63x55 smd: 1(-81.5,-47.5) 2(-81.5,47.5) 2(81.5,-47.5) 3(81.5,47.5)
  silkscreen extent -31,-72 31,72, body extent -114,-52 113,51, height 39
"CAP 150UF 25V" [mm]
  rect 1.2x3.2 smd: 1(0,3) 2(0,-3)
  silkscreen extent -4.2,-4.2 4.2,4.2, body extent -4.25,-5 4.25,5, height 10.5
"CAP 180UF 50V" [mm]
  rect 1x3.2 smd: 1(0,3.9) 2(0,-3.9)
  silkscreen extent -5.2,-5.2 5.2,5.2, body extent -5.2,-5.45 5.1,5.45, height 10.2
CAPC0603(1608)55_L [mm] "Chip Capacitor, Body 1.6x0.8mm, Height 0.55mm, IPC High Density"
  rect 0.7x0.9 smd: 1(-0.7,0) 2(0.7,0)
  silkscreen extent -0.05,-0.35 0.05,0.35, body extent -0.87,-0.47 0.88,0.48, height 0.55
CAPC0603(1608)55_N [mm] "Chip Capacitor, Body 1.6x0.8mm, Height 0.55mm, IPC Medium Density"
  rect 0.9x1 smd: 1(-0.8,0) 2(0.8,0)
  silkscreen extent -0.05,-0.4 0.05,0.4, body extent -0.87,-0.48 0.88,0.47, height 0.55
CAPC0603(1608)100_L [mm] "Chip Capacitor, Body 1.6x0.8mm, Height 1.0mm, IPC High Density"
  rect 0.7x0.9 smd: 1(-0.7,0) 2(0.7,0)
  silkscreen extent -0.05,-0.35 0.05,0.35, body extent -0.87,-0.47 0.88,0.48, height 1
CAPC0603(1608)100_M [mm] "Chip Capacitor, Body 1.6x0.8mm, Height 1.0mm, IPC Low Density"
  rect 1.1x1.1 smd: 1(-0.9,0) 2(0.9,0)
  silkscreen extent -0.05,-0.45 0.05,0.45, body extent -0.87,-0.47 0.88,0.48, height 1
CAPC0603(1608)100_N [mm] "Chip Capacitor, Body 1.6x0.8mm, Height 1.0mm, IPC Medium Density"
  rect 0.9x1 smd: 1(-0.8,0) 2(0.8,0)
  silkscreen extent -0.05,-0.4 0.05,0.4, body extent -0.87,-0.48 0.88,0.47, height 1
CAPC1210(3225)280_N [mm] "Chip Capacitor, Body 3.2x2.5mm, Height 2.8mm, IPC Medium Density"
  rect 1.15x2.7 smd: 1(-1.5,0) 2(1.5,0)
  silkscreen extent -0.55,-1.25 0.55,1.25, body extent -1.7,-1.4 1.7,1.4, height 2.8
DPAK127P1525X483-7N [mm] "D2-PAK, 7-Pads, Body 7.93x8.63mm (max), IPC Medium Density"
  rect 4.15x1.05 smd mask+0.051: 1(-6.25,3.81) 3(-6.25,-2.54) 3(-6.25,-1.27) 3(-6.25,1.27) 3(-6.25,2.54) 3(-6.25,-3.81)
  rect 8.8x10.6 smd: 2(3.95,0)
  silkscreen extent -6.38,-5.25 -0.85,5.25, body extent -7,-5 8,5, height 4.2
IHLP-6767GZ [mil]
  rect 150x675 smd: 1(-320,0) 2(320,0)
  silkscreen extent -420,-360 420,360, body extent -331,-331 331,331, height 197
JST-2-PTH-VERT [mil]
  round 63 hole 31.5: 1(-39.37,0) 2(39.37,0)
  silkscreen extent -116,-68 118,110, body extent -114,-64 118,113, height 236
JST-3-PTH-VERT [mil]
  round 63 hole 31.5: 1(-78.74,0) 2(0,0) 3(78.74,0)
  silkscreen extent -156,-68 157,110, body extent -155,-67 156,110, height 236
JST-13-PTH-VERT [mil]
  round 63 hole 31.5: 1(0,0) 2(98.43,0) 3(196.85,0) 4(295.28,0) 5(393.7,0) 6(492.13,0) 7(590.55,0) 8(688.98,0) 9(787.4,0) 10(885.83,0) 11(984.25,0) 12(1082.68,0) 13(1181.1,0)
  silkscreen extent -98,-93 1280,134, body extent -96,-94 1278,133, height 276
LT-G-44_L [mm] "SOP, 44-Leads, Body 13.1x5.6mm, Pitch 0.5mm, IPC High Density"
  oval 1.9x0.25 smd: 1(-3.375,5.25) 2(-3.375,4.75) 3(-3.375,4.25) 4(-3.375,3.75) 5(-3.375,3.25) 6(-3.375,2.75) 7(-3.375,2.25) 8(-3.375,1.75) 9(-3.375,1.25) 10(-3.375,0.75) 11(-3.375,0.25) 12(-3.375,-0.25) 13(-3.375,-0.75) 14(-3.375,-1.25) 15(-3.375,-1.75) 16(-3.375,-2.25) 17(-3.375,-2.75) 18(-3.375,-3.25) 19(-3.375,-3.75) 20(-3.375,-4.25) 21(-3.375,-4.75) 22(-3.375,-5.25) 23(3.375,-5.25) 24(3.375,-4.75) 25(3.375,-4.25) 26(3.375,-3.75) 27(3.375,-3.25) 28(3.375,-2.75) 29(3.375,-2.25) 30(3.375,-1.75) 31(3.375,-1.25) 32(3.375,-0.75) 33(3.375,-0.25) 34(3.375,0.25) 35(3.375,0.75) 36(3.375,1.25) 37(3.375,1.75) 38(3.375,2.25) 39(3.375,2.75) 40(3.375,3.25) 41(3.375,3.75) 42(3.375,4.25) 43(3.375,4.75) 44(3.375,5.25)
  silkscreen extent -3.5,-6.55 2.02,6.55, body extent -2.8,-6.55 2.8,6.55, height 2
LT-SW-20_M [mm] "SOIC, 20-Leads, Body 12.8x7.49mm, Pitch 1.27mm, IPC Low Density"
  oval 2.6x0.7 smd: 1(-4.6,5.715) 2(-4.6,4.445) 3(-4.6,3.175) 4(-4.6,1.905) 5(-4.6,0.635) 6(-4.6,-0.635) 7(-4.6,-1.905) 8(-4.6,-3.175) 9(-4.6,-4.445) 10(-4.6,-5.715) 11(4.6,-5.715) 12(4.6,-4.445) 13(4.6,-3.175) 14(4.6,-1.905) 15(4.6,-0.635) 16(4.6,0.635) 17(4.6,1.905) 18(4.6,3.175) 19(4.6,4.445) 20(4.6,5.715)
  silkscreen extent -4.72,-6.5 2.9,6.74, body extent -3.8,-6.5 3.8,6.5, height 2.65
MAXM-T1032N+1_V [mm] "TDFN, 10-Leads, Body 2x3mm, Pitch 0.50mm, Thermal Pad 0.8x2.08mm"
  rect 0.7x0.3 smd: 1(-0.99,1) 2(-0.99,0.5) 3(-0.99,0) 4(-0.99,-0.5) 5(-0.99,-1) 6(0.99,-1) 7(0.99,-0.5) 8(0.99,0) 9(0.99,0.5) 10(0.99,1)
  rect 0.8x2.08 smd: 11(0,0)
  silkscreen extent -2.01,-1.5 0.45,1.5, body extent -1,-1.5 1,1.5, height 0.8
MSOP10 [mm]
  oval 1.53x0.36 smd mask+0.076: 0(-2.352,1.02) 4(-2.352,-1.02) 5(2.353,1.02) 9(2.353,-1.02)
  oval 1.53x0.32 smd mask+0.076: 1(-2.352,0.5) 2(-2.352,0) 3(-2.352,-0.5) 6(2.353,0.5) 7(2.353,0) 8(2.353,-0.5)
  silkscreen extent -1.55,-1.55 1.55,1.55, body extent -1.5,-1.5 1.5,1.5, height 1
MSOP-8 [mm] "SOP, 8-Leads, Body 3x3mm, Pitch 0.65mm, IPC Medium Density"
  oval 1.6x0.45 smd: 1(-2.15,0.975) 2(-2.15,0.325) 3(-2.15,-0.325) 4(-2.15,-0.975) 5(2.15,-0.975) 6(2.15,-0.325) 7(2.15,0.325) 8(2.15,0.975)
  silkscreen extent -2.28,-1.55 0.95,1.87, body extent -1.55,-1.55 1.55,1.55, height 0.05
MURA-BLM31-B60-CHIP-2_V3 [mm] "Chip Ferrite Bead, 2-Leads, Body 3.2x1.6mm, Height 1.3mm, 70um Land Pad Thickness, 6A Rated Current"
  rect 1.6x1.2 smd: 1(-1.8,0) 2(1.8,0)
  Top Layer region: -2.6,-0.825 -1,-0.825 -1,0.825 -2.6,0.825
  Top Layer region: 2.6,0.825 1,0.825 1,-0.825 2.6,-0.825
  body extent -1.6,-0.8 1.6,0.8, height 1.3
ONSC-SMB-2-403A-03_H_V [mil] "Molded, 2-Leads, Body 4.6x3.95mm"
  rect 85x107.99 smd: 1(-87.01,0) 2(87.01,0)
  silkscreen extent -125,-79 91,81, body extent -91,-78 91,78, height 95
ONSC-SOD-123-2-425-04_V [mm] "SOD, 2-Leads, Body 2.69x1.6mm"
  rect 0.91x1.22 smd: 1(-1.635,0) 2(1.635,0)
  silkscreen extent -1.76,-0.8 0.78,1.29, body extent -1.35,-0.8 1.35,0.8, height 1.35
ONSC-SOD-323-2-477-02_V [mm] "SOD, 2-Leads, Body 1.7x1.25mm"
  rect 0.63x0.83 smd: 1(-1.115,0) 2(1.115,0)
  silkscreen extent -1.24,-0.67 0.4,1.09, body extent -0.85,-0.63 0.85,0.63, height 1.06
ONSC-SOT-23-3-318-08_V [mm] "SOT23, 3-Leads, Body 2.92x1.3mm, Pitch 0.95mm"
  rect 0.9x0.8 smd: 1(-1,0.95) 2(-1,-0.95) 3(1,0)
  silkscreen extent -1.13,-1.46 0.65,2.02, body extent -0.65,-1.46 0.65,1.46, height 1.11
QFN38 [mm] "QFN, 38-Leads, Body 5,00x7,00mm, Pitch 0,50mm, Thermal Pad 3,25x5,75mm, IPC Medium Density"
  rect 1.3x0.25 smd: 1(-2.75,2.75) 2(-2.75,2.25) 3(-2.75,1.75) 4(-2.75,1.25) 5(-2.75,0.75) 6(-2.75,0.25) 7(-2.75,-0.25) 8(-2.75,-0.75) 9(-2.75,-1.25) 10(-2.75,-1.75) 11(-2.75,-2.25) 12(-2.75,-2.75) 20(2.75,-2.75) 21(2.75,-2.25) 22(2.75,-1.75) 23(2.75,-1.25) 24(2.75,-0.75) 25(2.75,-0.25) 26(2.75,0.25) 27(2.75,0.75) 28(2.75,1.25) 29(2.75,1.75) 30(2.75,2.25) 31(2.75,2.75)
  rect 0.25x1.3 smd: 13(-1.5,-3.75) 14(-1,-3.75) 15(-0.5,-3.75) 16(0,-3.75) 17(0.5,-3.75) 18(1,-3.75) 19(1.5,-3.75) 32(1.5,3.75) 33(1,3.75) 34(0.5,3.75) 35(0,3.75) 36(-0.5,3.75) 37(-1,3.75) 38(-1.5,3.75)
  rect 3.15x5.15 smd: 39(0,0)
  silkscreen extent -3.47,-3.7 2.7,3.7, body extent -2.55,-3.55 2.55,3.55, height 0.75
RESC0603(1608)_L [mm] "Chip Resistor, Body 1.6x0.8mm, IPC High Density"
  rect 0.7x0.9 smd: 1(-0.7,0) 2(0.7,0)
  silkscreen extent -0.05,-0.35 0.05,0.35, body extent -0.85,-0.47 0.85,0.47, height 0.6
RESC0603(1608)_N [mm] "Chip Resistor, Body 1.6x0.8mm, IPC Medium Density"
  rect 0.9x1 smd: 1(-0.8,0) 2(0.8,0)
  silkscreen extent -0.05,-0.4 0.05,0.4, body extent -0.85,-0.47 0.85,0.47, height 0.6
RESC1206(3216)_L [mm] "Chip Resistor, Body 3.2x1.6mm, IPC High Density"
  rect 0.95x1.7 smd: 1(-1.35,0) 2(1.35,0)
  silkscreen extent -0.5,-0.75 0.5,0.75, body extent -1.67,-0.87 1.67,0.87, height 0.75
RESC2010(5025)_M [mm] "Chip Resistor, Body 5.0x2.5mm, IPC Low Density"
  rect 1.45x2.8 smd: 1(-2.45,0) 2(2.45,0)
  silkscreen extent -1.35,-1.3 1.35,1.3, body extent -2.6,-1.35 2.6,1.35, height 0.71
RESC2512(6432)_N [mm] "Chip Resistor, Body 6.4x3.2mm, IPC Medium Density"
  rect 1.25x3.35 smd: 1(-3,0) 2(3,0)
  silkscreen extent -2,-1.57 2,1.58, body extent -3.25,-1.7 3.25,1.7, height 0.75
SDR0604 [mm]
  rrect100% 2.1x5.8 smd: 1(-1.95,0) 2(1.95,0)
  Top Layer region: -2,2.9 -0.9,2.9 -0.9,-2.9 -2,-2.9 -2.5,-2.766 -2.866,-2.4 -3,-1.9 -3,-1.9 -3,1.9 -2.866,2.4 -2.5,2.766 -2,2.9
  Top Layer region: 2,2.9 0.9,2.9 0.9,-2.9 2,-2.9 2.5,-2.766 2.866,-2.4 3,-1.9 3,-1.9 3,1.9 2.866,2.4 2.5,2.766 2,2.9
  silkscreen extent -0.6,-2.9 0.6,2.9, body extent -2.75,-2.8 2.75,2.8, height 4.55
SOD323 [mm] "SODFL, 2-Leads, Body 1.30x2.57mm, IPC Medium Density"
  rect 0.85x0.4 smd: 1(-1.175,0) 2(1.175,0)
  silkscreen extent -1.55,-0.75 0.95,0.75, body extent -0.95,-0.72 0.95,0.72, height 1.14
SOD-123 [mm] "SOD, 2-Leads, Body 2.69x1.6mm"
  rect 0.91x1.22 smd: 1(-1.635,0) 2(1.635,0)
  silkscreen extent -1.76,-0.8 0.78,1.28, body extent -1.35,-0.8 1.35,0.8, height 1.35
SOIC127P600X175-8N [mm] "SOIC, 8-Leads, Body 4.90x3.90mm, Pitch 1.27mm, IPC Medium Density"
  rect 1.194x0.56 smd: 1(-2.528,-0.635) 1(-2.528,0.635) 1(-2.528,1.905) 2(-2.528,-1.905) 3(2.527,-1.905) 3(2.527,-0.635) 3(2.527,0.635) 3(2.527,1.905)
  Top Layer region: -0.762,2.032 2.286,2.032 2.286,-2.032 -0.762,-2.032
  silkscreen extent -1.6,-2.5 1.6,2.5, body extent -2,-2.5 2,2.5, height 1.75
SOT23-3 [mil]
  rect 32x36 smd: 1(-37.4,-39.37) 2(0,44) 3(38,-39.37)
  silkscreen extent -55,-4 56,28, body extent -58,-50 60,50, height 39
SOT65P280X145-6N [mm] "SOT23, 6-Leads, Body 2.90x2.80mm, Pitch 0.65mm, IPC Medium Density"
  rect 1x0.45 smd mask+0.08: 1(-1.3,0.975) 2(-1.3,0.325) 3(-1.3,-0.325) 4(-1.3,-0.975) 5(1.3,-0.975) 6(1.3,-0.325) 7(1.3,0.325) 8(1.3,0.975)
  silkscreen extent -1.5,-1.5 0.5,1.57, body extent -0.88,-1.5 0.87,1.5, height 1.45
STM-LQFP48_L [mm] "QFP, 48-Leads, Body 7x7mm, Pitch 0.5mm, IPC High Density"
  oval 1.55x0.25 smd: 1(-4.025,2.75) 2(-4.025,2.25) 3(-4.025,1.75) 4(-4.025,1.25) 5(-4.025,0.75) 6(-4.025,0.25) 7(-4.025,-0.25) 8(-4.025,-0.75) 9(-4.025,-1.25) 10(-4.025,-1.75) 11(-4.025,-2.25) 12(-4.025,-2.75) 25(4.025,-2.75) 26(4.025,-2.25) 27(4.025,-1.75) 28(4.025,-1.25) 29(4.025,-0.75) 30(4.025,-0.25) 31(4.025,0.25) 32(4.025,0.75) 33(4.025,1.25) 34(4.025,1.75) 35(4.025,2.25) 36(4.025,2.75)
  oval 0.25x1.55 smd: 13(-2.75,-4.025) 14(-2.25,-4.025) 15(-1.75,-4.025) 16(-1.25,-4.025) 17(-0.75,-4.025) 18(-0.25,-4.025) 19(0.25,-4.025) 20(0.75,-4.025) 21(1.25,-4.025) 22(1.75,-4.025) 23(2.25,-4.025) 24(2.75,-4.025) 37(2.75,4.025) 38(2.25,4.025) 39(1.75,4.025) 40(1.25,4.025) 41(0.75,4.025) 42(0.25,4.025) 43(-0.25,4.025) 44(-0.75,4.025) 45(-1.25,4.025) 46(-1.75,4.025) 47(-2.25,4.025) 48(-2.75,4.025)
  silkscreen extent -4.15,-2.85 2.85,3.55, body extent -3.5,-3.5 3.5,3.5, height 1.6
SWITCH [mm]
  rect 0.9x1 smd: 1(-2.05,0.8) 2(2.05,0.8) 3(-2.05,-0.8) 4(2.05,-0.8)
  silkscreen extent -1.3,-1.4 1.3,1.4, body extent -2.3,-1.4 2.3,1.4, height 1.9
USB-MICROB [mil]
  rect 14x56 smd: D+(0,105) D-(-25.59,105) GND(52,105) ID(26,105) VBUS(-51.18,105)
  rect 71x75 smd: MT1(-157.48,0) MT2(158,0)
  rect 75x75 smd: P$1(-50,0) P$2(50,0)
  silkscreen extent -134,-57 134,113, body extent -157,-98 157,115, height 112
WSL2726 [mm]
  rect 2.44x5.6 smd: 1(-2.48,-0.89) 2(2.48,-0.89)
  rect 2.44x0.89 smd: 3(-2.48,3.245) 4(2.48,3.245)
  silkscreen extent -0.9,-3.5 0.9,3.5, body extent -3.45,-3.04 3.45,3.56, height 2.95

## Part data
C1 C3 C4 C5 C7 C10: library part CMP-1035-02730-1, "CAP 1uF 6.3V ±10% 0603 (1608 Metric) Thickness 1mm SMD"
C1_S1 C1_S2 C1_S3 C1_S4 C1_S5 C1_S6 C1_S7 C1_S8 C1_S9 C1_S10 C1_S11 C1_S12: library part CMP-1035-02575-1, "CAP 100nF 6.3V ±5% 0603 (1608 Metric) Thickness 1mm SMD"
C2: library part CMP-1035-02595-1, "CAP 100nF 100V ±10% 0603 (1608 Metric) Thickness 1mm SMD"
C6 C8 C14 C23 C24 C25 C26 C30 C31 C46 C47: library part CMP-1035-02762-1, "CAP 2.2uF 16V ±10% 0603 (1608 Metric) Thickness 0.55mm SMD"
C9 C11 C12 C13: library part CMP-1038-02301-1, "CAP 100uF 10V ±10% 1210 (3225 Metric) Thickness 2.8mm SMD"
C22 C43: library part CMP-1035-02751-1, "CAP 2.2uF 4V ±10% 0603 (1608 Metric) Thickness 0.55mm SMD"
C32 C40 C42: library part CMP-1035-02740-1, "CAP 1uF 25V ±10% 0603 (1608 Metric) Thickness 1mm SMD"
C33: library part "CAP 180uF 50V", "Polarized Capacitor (Axial)"
C34: library part CMP-1035-02463-1, "CAP 33nF 25V ±5% 0603 (1608 Metric) Thickness 1mm SMD"
C35: library part CMP-1035-02779-1, "CAP 4.7uF 6.3V ±10% 0603 (1608 Metric) Thickness 0.55mm SMD"
C36: library part CMP-1035-02018-1, "CAP 2.2nF 6.3V ±5% 0603 (1608 Metric) Thickness 1mm SMD"
C37: library part CMP-1035-01762-1, "CAP 680pF 6.3V ±5% 0603 (1608 Metric) Thickness 1mm SMD"
C38: library part CMP-1035-02679-1, "CAP 330nF 50V ±10% 0603 (1608 Metric) Thickness 1mm SMD"
C39: library part CMP-1035-01943-1, "CAP 1.5nF 6.3V ±5% 0603 (1608 Metric) Thickness 1mm SMD"
C41: library part CMP-1035-02591-1, "CAP 100nF 50V ±5% 0603 (1608 Metric) Thickness 1mm SMD"
C45: library part "CAP 150uF 25V", "Polarized Capacitor (Axial)"
D1: library part CMHZ5265B
D1_S1 D1_S2 D1_S3 D1_S4 D1_S5 D1_S6 D1_S7 D1_S8 D1_S9 D1_S10 D1_S11 D1_S12: library part CMP-1060-00726-1, "Zener Voltage Regulator, 300 mW, 2-Pin SOD-323, Tape and Reel"
D2_S1 D2_S2 D2_S3 D2_S4 D2_S5 D2_S6 D2_S7 D2_S8 D2_S9 D2_S10 D2_S11 D2_S12: library part CMP-1426-00001-1, "SMD mono-color Chip LED, WL-SMCW, Red"
D4: library part CMP-1055-00339-1, "Schottky Power Rectifier, 2-Pin SMB, Pb-Free, Tape and Reel"
D17: library part CMP-1060-00237-1, "Zener Voltage Regulator, 500 mW, 2-Pin SOD-123, Pb-Free, Tape and Reel"
D20: library part CMP-1060-00911-1, "Zener Voltage Regulator, 225 mW, 3-Pin SOT-23, Pb-Free, Tape and Reel"
F1 F2: library part "FUSE 1206", "Fuse"
JP1: library part JST_XH_13
JP2 JP5 JP6 JP7: library part JST_2_VERT
JP3 JP4: library part JST_3
JP8: library part USB_MICROB_PLUG-SMT
L1: library part MURA-FB-2
L2: "Inductor"
L3: library part IHLP6767, "Inductor"
Q1_S1 Q1_S2 Q1_S3 Q1_S4 Q1_S5 Q1_S6 Q1_S7 Q1_S8 Q1_S9 Q1_S10 Q1_S11 Q1_S12 Q19 Q24: library part MOSFET-P, "P-Channel MOSFET"
Q13 Q14 Q15 Q16 Q17 Q18 Q21 Q22 Q23: library part MOSFET-N, "N-Channel MOSFET"
R1 R2 R3 R9 R10 R12: library part CMP-1012-00849-1, "1M 0.1W 1% 0603 (1608 Metric)  SMD"
R1_S1 R1_S2 R1_S3 R1_S4 R1_S5 R1_S6 R1_S7 R1_S8 R1_S9 R1_S10 R1_S11 R1_S12 R8 R11 R14_S1 R14_S2 R14_S3 R14_S4 R14_S5 R14_S6 R14_S7 R14_S8 R14_S9 R14_S10 R14_S11 R14_S12 R15 R16 R17 R49 R58 R59 R70: library part CMP-1012-00050-1, "100R 0.1W 5% 0603 (1608 Metric)  SMD"
R4 R6: library part CMP-1012-00122-1, "100K 0.1W 5% 0603 (1608 Metric)  SMD"
R4_S1 R4_S2 R4_S3 R4_S4 R4_S5 R4_S6 R4_S7 R4_S8 R4_S9 R4_S10 R4_S11 R4_S12: library part CMP-1012-00086-1, "3K3 0.1W 5% 0603 (1608 Metric)  SMD"
R5: library part CMP-1012-00124-1, "120K 0.1W 5% 0603 (1608 Metric)  SMD"
R7: "Resistor"
R13_S1 R13_S2 R13_S3 R13_S4 R13_S5 R13_S6 R13_S7 R13_S8 R13_S9 R13_S10 R13_S11 R13_S12: library part CMP-1018-00014-1, "10R 1W 5% 2512 (6432 Metric)  SMD"
R50: library part CMP-1012-00650-1, "18K 0.1W 1% 0603 (1608 Metric)  SMD"
R51: library part CMP-1012-00572-1, "3K6 0.1W 1% 0603 (1608 Metric)  SMD"
R52 R53: library part CMP-1014-00171-1, "1R 0.25W 1% 1206 (3216 Metric)  SMD"
R54: library part CMP-1012-00680-1, "33K 0.1W 1% 0603 (1608 Metric)  SMD"
R55 R56: library part CMP-1012-00123-1, "110K 0.1W 5% 0603 (1608 Metric)  SMD"
R57 R60: library part CMP-1012-00152-1, "1M8 0.1W 5% 0603 (1608 Metric)  SMD"
R61: library part CMP-1017-00171-1, "1R 0.75W 1% 2010 (5025 Metric)  SMD"
R62: library part CMP-1012-00811-1, "464K 0.1W 1% 0603 (1608 Metric)  SMD"
R64: library part CMP-1012-00685-1, "36K 0.1W 1% 0603 (1608 Metric)  SMD"
R65 R67: library part CMP-1012-00098-1, "10K 0.1W 5% 0603 (1608 Metric)  SMD"
R66: library part CMP-1012-00087-1, "3K6 0.1W 5% 0603 (1608 Metric)  SMD"
R68: library part CMP-1018-00496-1, "750R 1W 1% 2512 (6432 Metric)  SMD"
R69: library part CMP-1012-00098-1, "18K 0.1W 5% 0603 (1608 Metric)  SMD"
SW1 SW2: library part DIPT-DTSM-6, "Switch, SPNO Push Button SMD"
U1: library part CMP-0471-00238-1, "Multicell Battery Stack Monitor, 60 V Vin MAX, 44-pin SOP (G-44), -40 to 125 degC, Pb-Free"
U2: library part CMP-1264-00007-1, "Ultra-Small, High-Efficiency, Synchronous Step-Down DC-DC Converter, 4.5 to 60 V, 1 A, -40 to 125 degC, 10-Pin TDFN (T1032N+1), RoHS, Tube"
U3: library part CMP-0572-00018-2, "ARM Cortex-M4 32-bit MCU, 128 KB Flash, 32 KB Internal RAM, 37 I/Os, 48-pin LQFP, -40 to 105 degC, Tray"
U8: library part CMP-0479-00631-1, "Quad Protected High-Side MOSFET Driver, 8 to 48 V Vin, 20-pin SOIC (SW-20), -40 to 85 degC, Pb-Free"
X1: library part ABRA-ABM3B-4

## Free pads (board coordinates)
  round 122.05 hole 122.05 mask+0: 2(4565,4165) 2(4580,6800) 2(6260,6800) 2(6270,4150)

## Via types
v1: diameter 28, hole 13, Top Layer to Bottom Layer, 232 vias
v2: diameter 28, hole 15, Top Layer to Bottom Layer, 52 vias
v3: diameter 23.62, hole 11.81, Top Layer to Bottom Layer, 15 vias

## Nets (pads, with @x,y where several pads share a name; then routed paths per layer and width w, separated by ;. In a path a pad name is that pad's centre, name@x,y a point inside that pad or via, vN(x,y) a via of type N, cw(c..) or ccw(c..) an arc to the next point about the centre after c; other vN are vias at no path point)
B+: F1.1 F2.1
C+: C42.2 C45.1 D17.1 R50.2 R52.2 R65.2 U7.7 U7.10 U7.36 | length 2358.2
  Top Layer w10: U7.10@4715.54,5156.02 4715.54,5182.41 4700.57,5197.37 4700.57,5238.07 C42.2@4686.26,5252.39 4713.87,5280 4768.14,5280 4775.75,5272.39 4778.26,5272.39 4790.05,5284.17 4842.47,5284.17 4910.15,5216.49 5144.57,5216.49 5145.57,5215.49 ; U7.7@4774.59,5156.02 4774.59,5182.41 4769.82,5187.18 4769.82,5231.33 4774.98,5236.49 4774.98,5273.16 ; U7.36@4932.07,5067.44 U7.36@4932.07,5067.44 4996.61,5067.39 5003.11,5073.88 5079.88,5073.88 5099.08,5054.68 5099.08,5050.75 D17.1@5112.07,5050.75 5145.57,5084.25 5145.57,5215.49 ; v1(5145.57,5305.49) 5145.57,5215.49 ; C45.1@5396.26,5366.7 5396.26,5354.81 5464.07,5287 5587.41,5287 5752.02,5122.39 v1(5976.26,5122.39)
  Bottom Layer w10: v1(5145.57,5305.49) 5270.93,5305.49 5370.57,5405.14 5370.57,5410.18 R52.2@5396.26,5410.18 ; R50.2@5976.26,5109.57 5997.89,5131.2 6072.47,5131.2 6113.19,5090.49 R65.2@6113.19,5100.52
  other v1: 5386.26,5398.59 5416.26,5398.59 5385.57,5425.49 5415.57,5425.49
CAN_RX: U3.45 U4.4 | length 129.9
  Top Layer w10: U4.4@5051.18,5528.39 5040,5539.57 5040,5580.96 5069.13,5610.09 5069.13,5641.46 U3.45@5069.21,5641.54
CAN_TX: U3.46 U4.1 | length 202.9
  Top Layer w10: 5061.18,5451.61 5071.87,5462.3 5071.87,5541.8 5070,5543.67 5070,5585.36 5088.9,5604.25 U3.46@5088.9,5641.54
CELL1: JP1.2 Q1_S1.3 R1_S1.2 R13_S2.2 R14_S2.1 | length 822.7
  Top Layer w10: R1_S1.2@4637.5,6450 R1_S1.2@4637.5,6460 4637.5,6472.5 4629.5,6480.5 4629.5,6625.86 4723.64,6720 4878.43,6720 JP1.2@4928.43,6770
  Bottom Layer w10: R13_S2.2@4807.5,6574.72 4776,6606.22 R14_S2.1@4776,6638.5 4776,6646 4820,6690 4836.5,6690 JP1.2@4928.43,6770
CELL2: JP1.3 Q1_S2.3 R1_S2.2 R13_S3.2 R14_S3.1 | length 762.8
  Top Layer w10: R1_S2.2@4777.5,6450 R1_S2.2@4777.5,6460 4777.5,6472.5 4769.5,6480.5 4769.5,6625.86 4847.64,6704 4954,6704 JP1.3@5030,6780
  Bottom Layer w10: R13_S3.2@4957.5,6574.72 4926,6606.22 R14_S3.1@4926,6638.5 4942.5,6638.5 4942.5,6648.86 5024.21,6730.58 5024.21,6764.21 JP1.3@5026.85,6770
CELL3: JP1.4 Q1_S3.3 R1_S3.2 R13_S4.2 R14_S4.1 | length 678.6
  Top Layer w10: R1_S3.2@4927.5,6450 R1_S3.2@4927.5,6460 4927.5,6472.5 4919.5,6480.5 4919.5,6625.86 4973.14,6679.5 5026.35,6679.5 JP1.4@5125.28,6770
  Bottom Layer w10: R13_S4.2@5107.5,6574.72 5076,6606.22 R14_S4.1@5076,6638.5 5090,6638.5 5090,6670 5123.64,6703.64 JP1.4@5123.64,6770
CELL4: JP1.5 Q1_S4.3 R1_S4.2 R13_S5.2 R14_S5.1 | length 625.8
  Top Layer w10: R1_S4.2@5077.5,6450 R1_S4.2@5077.5,6460 5077.5,6472.5 5069.5,6480.5 5069.5,6625.86 5213.64,6770 JP1.5@5223.7,6770
  Bottom Layer w10: JP1.5@5215.28,6790 5215.28,6661.42 5226,6650.7 R14_S5.1@5226,6638.5 5226,6606.22 R13_S5.2@5257.5,6574.72
CELL5: JP1.6 Q1_S5.3 R1_S5.2 R13_S6.2 R14_S6.1 | length 614.4
  Top Layer w10: R1_S5.2@5227.5,6450 R1_S5.2@5227.5,6460 5227.5,6472.5 5219.5,6480.5 Q1_S5.3@5219.5,6587.87 5219.5,6675.8 5322.13,6778.43 JP1.6@5322.13,6770
  Bottom Layer w10: JP1.6@5322.13,6770 5380,6703.7 5380,6642.5 R14_S6.1@5376,6638.5 5376,6606.22 R13_S6.2@5407.5,6574.72
CELL6: JP1.7 Q1_S6.3 R1_S6.2 R13_S7.2 R14_S7.1 | length 599.2
  Top Layer w10: R1_S6.2@5377.5,6450 R1_S6.2@5377.5,6460 5377.5,6472.5 5369.5,6480.5 Q1_S6.3@5369.5,6587.87 5369.5,6727.37 JP1.7@5420.55,6770
  Bottom Layer w10: JP1.7@5420.55,6770 5420.55,6743.95 R14_S7.1@5526,6638.5 5526,6606.22 R13_S7.2@5557.5,6574.72
CELL7: JP1.8 Q1_S7.3 R1_S7.2 R13_S8.2 R14_S8.1 | length 622.4
  Top Layer w10: JP1.8@5518.98,6770 5519.5,6761.06 5519.5,6480.5 5527.5,6472.5 R1_S7.2@5527.5,6460 R1_S7.2@5527.5,6450
  Bottom Layer w10: JP1.8@5518.98,6770 5518.98,6751.72 5600.7,6670 5644.5,6670 R14_S8.1@5676,6638.5 5676,6606.22 R13_S8.2@5707.5,6574.72
CELL8: JP1.9 Q1_S8.3 R1_S8.2 R13_S9.2 R14_S9.1 | length 699.6
  Top Layer w10: JP1.9@5617.4,6770 5669.5,6717.91 5669.5,6480.5 5677.5,6472.5 R1_S8.2@5677.5,6460 R1_S8.2@5677.5,6450
  Bottom Layer w10: JP1.9@5617.4,6770 5617.4,6738.3 5685.7,6670 5760.45,6670 5767.71,6662.75 5767.71,6662.29 5790,6640 R14_S9.1@5824.5,6640 5824.5,6609.61 R13_S9.2@5856,6578.11
CELL9: JP1.10 Q1_S9.3 R1_S9.2 R13_S10.2 R14_S10.1 | length 770.9
  Top Layer w10: JP1.10@5715.83,6770 5715.83,6761.57 5818,6659.4 Q1_S9.3@5818,6589.37 5818,6482 5826,6474 R1_S9.2@5826,6461.5 R1_S9.2@5826,6451.5
  Bottom Layer w10: JP1.10@5715.83,6770 5715.83,6737.95 5783.09,6670.69 5909.77,6670.69 5916.21,6664.24 5916.21,6663.37 5939.59,6640 R14_S10.1@5974.5,6640 5974.5,6609.61 R13_S10.2@6006,6578.11
CELL10: JP1.11 Q1_S10.3 R1_S10.2 R13_S11.2 R14_S11.1 | length 819.7
  Top Layer w10: JP1.11@5814.25,6770 5814.25,6765.69 5898.44,6681.5 5898.41,6681.59 5970,6610 Q1_S10.3@5968,6589.37 5968,6482 5976,6474 R1_S10.2@5976,6461.5 R1_S10.2@5976,6451.5
  Bottom Layer w10: JP1.11@5814.25,6770 5897.57,6686.69 6071.82,6686.69 R14_S11.1@6118.5,6640 6118.5,6609.61 R13_S11.2@6150,6578.11
CELL11: JP1.12 Q1_S11.3 R1_S11.2 R13_S12.2 R14_S12.1 | length 924.1
  Top Layer w10: JP1.12@5912.68,6770 5912.68,6788.69 Q1_S11.3@6112,6589.37 6112,6482 6120,6474 R1_S11.2@6120,6461.5 R1_S11.2@6120,6451.5
  Bottom Layer w10: JP1.12@5912.68,6770 5972.68,6710 6197.13,6710 R14_S12.1@6266.5,6640.63 6266.5,6610.24 R13_S12.2@6298,6578.74
CELL12: JP1.13 Q1_S12.3 R1_S12.2 | length 447.2
  Top Layer w10: JP1.13@6011.1,6770 6111.1,6670 6186.85,6670 6245.36,6611.5 6245.36,6590 Q1_S12.3@6260,6590 ; 6260,6570 6260,6482.63 6268,6474.63 R1_S12.2@6268,6462.13